# Altium PCB WX0.000.863.PcbDoc (part 1 of 4)
Units mil, origin at the board's own origin, x right, y up, seen from the top; angles counter-clockwise.
Board outline 6000 x 4000 mil, 2 copper layers (Top Layer, Bottom Layer); 210 components, 152 nets, 629 pads, 401 vias.
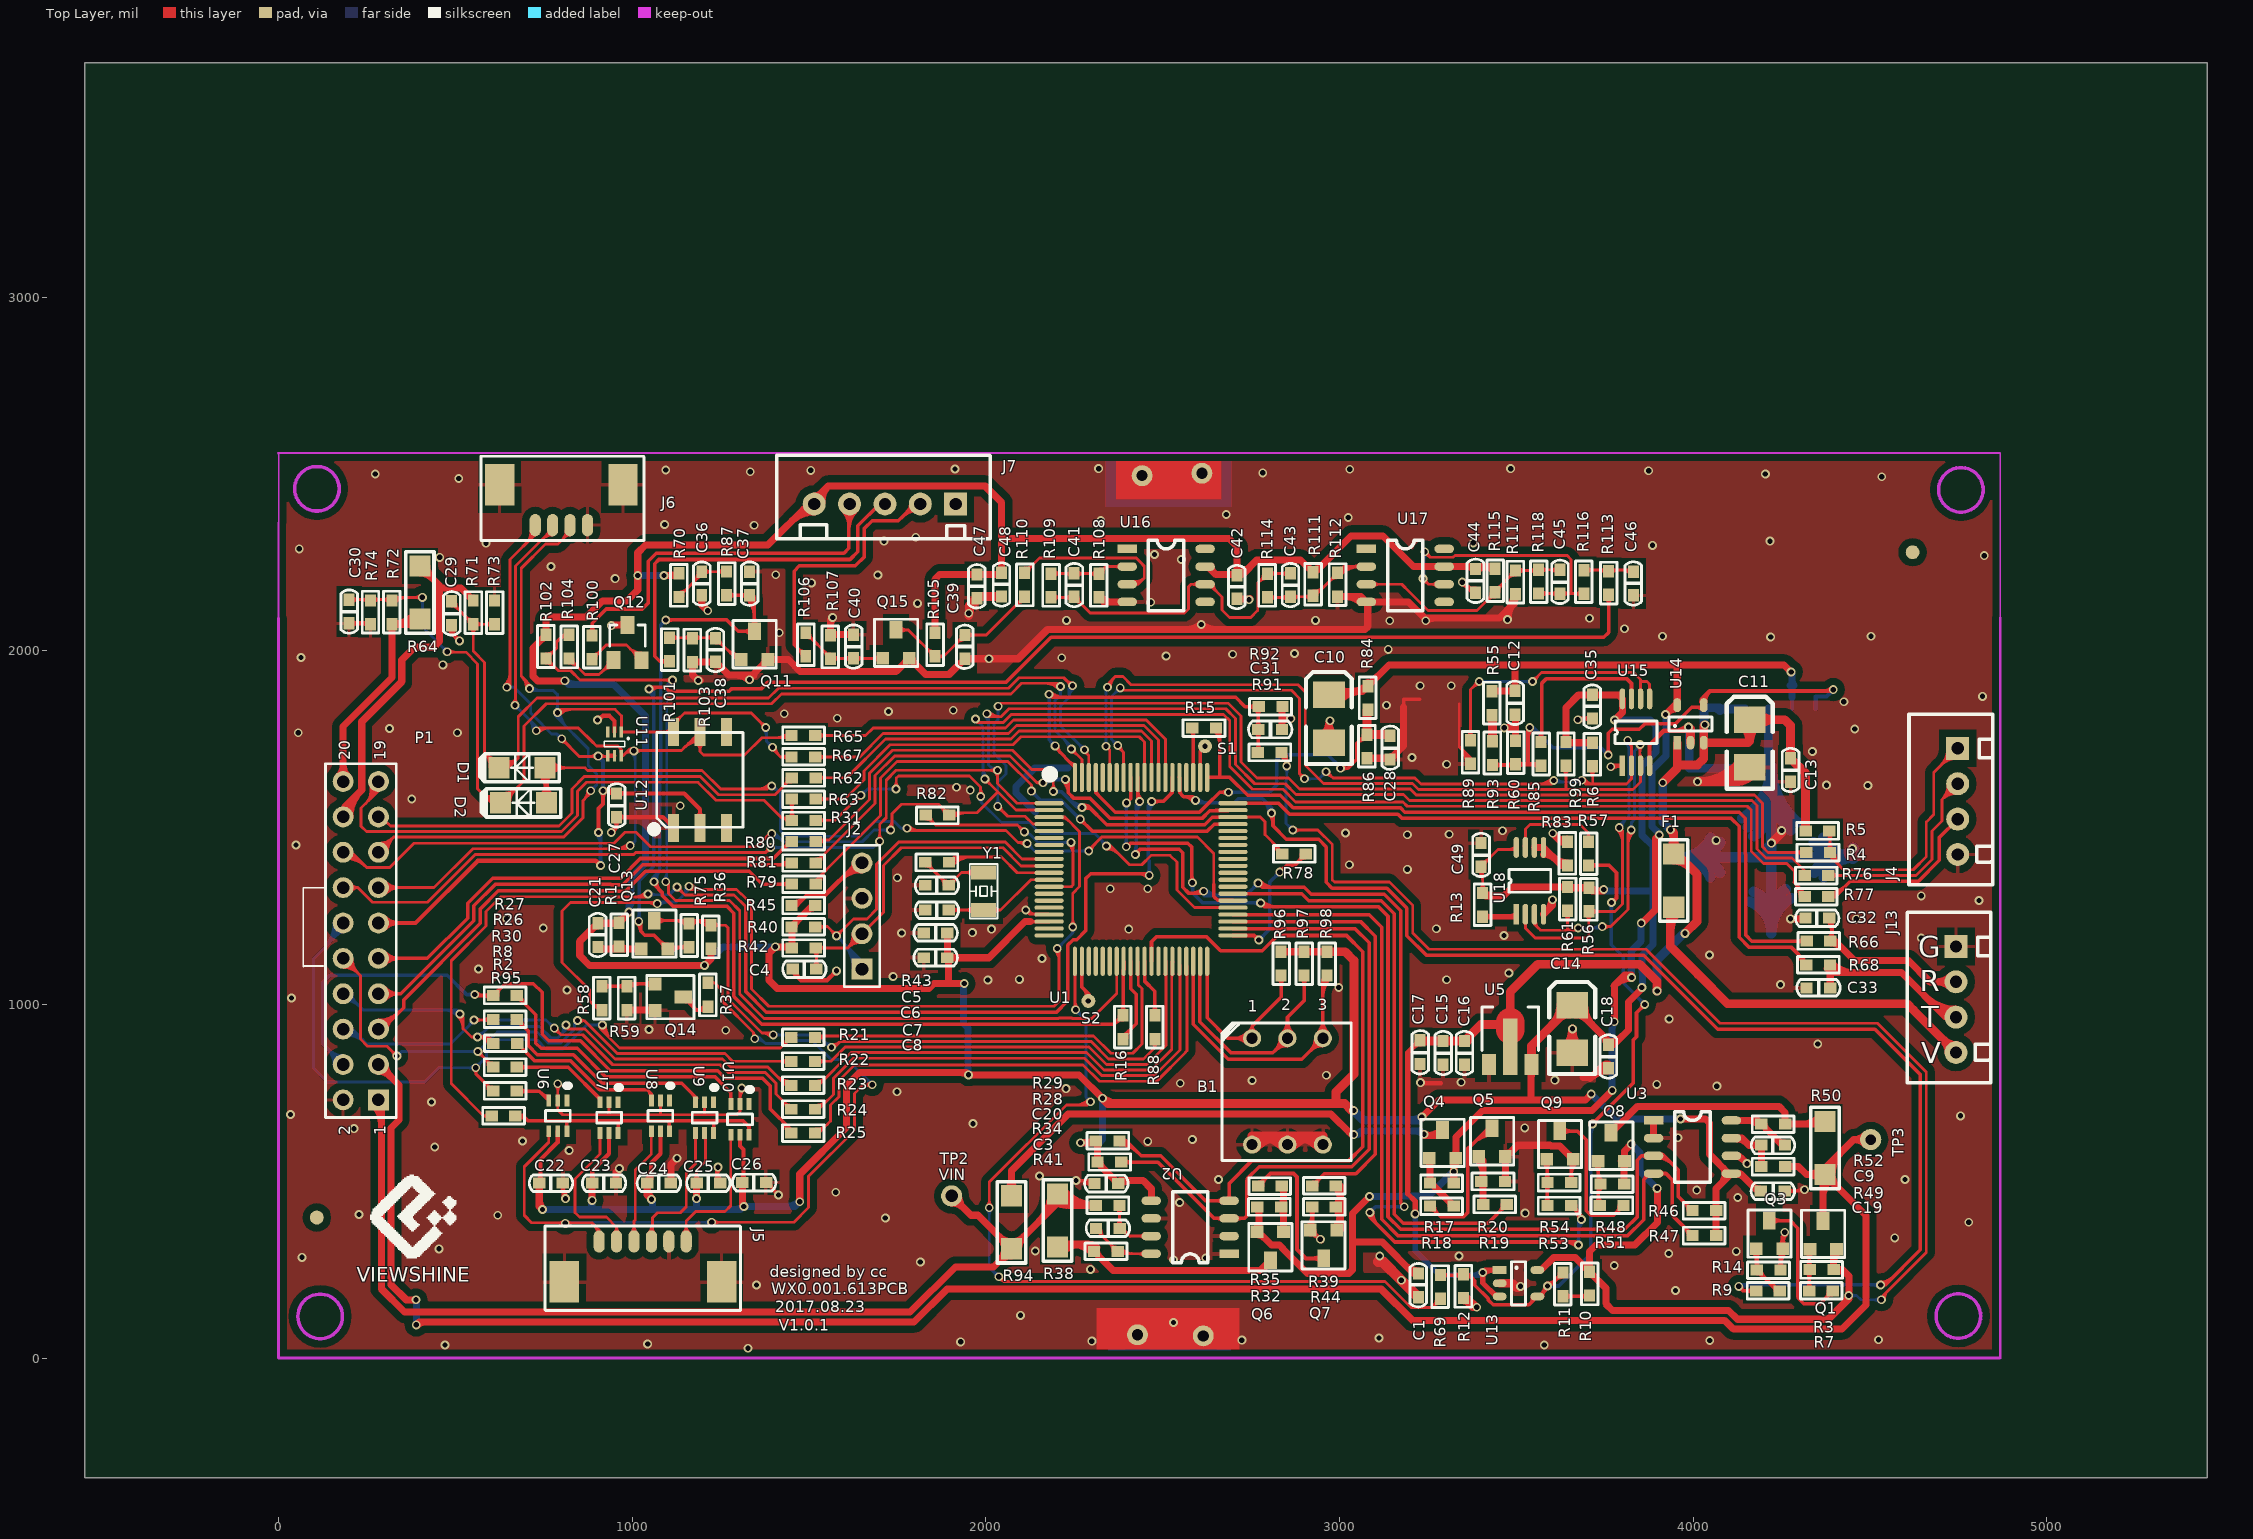
[diagram p0: Top Layer view]
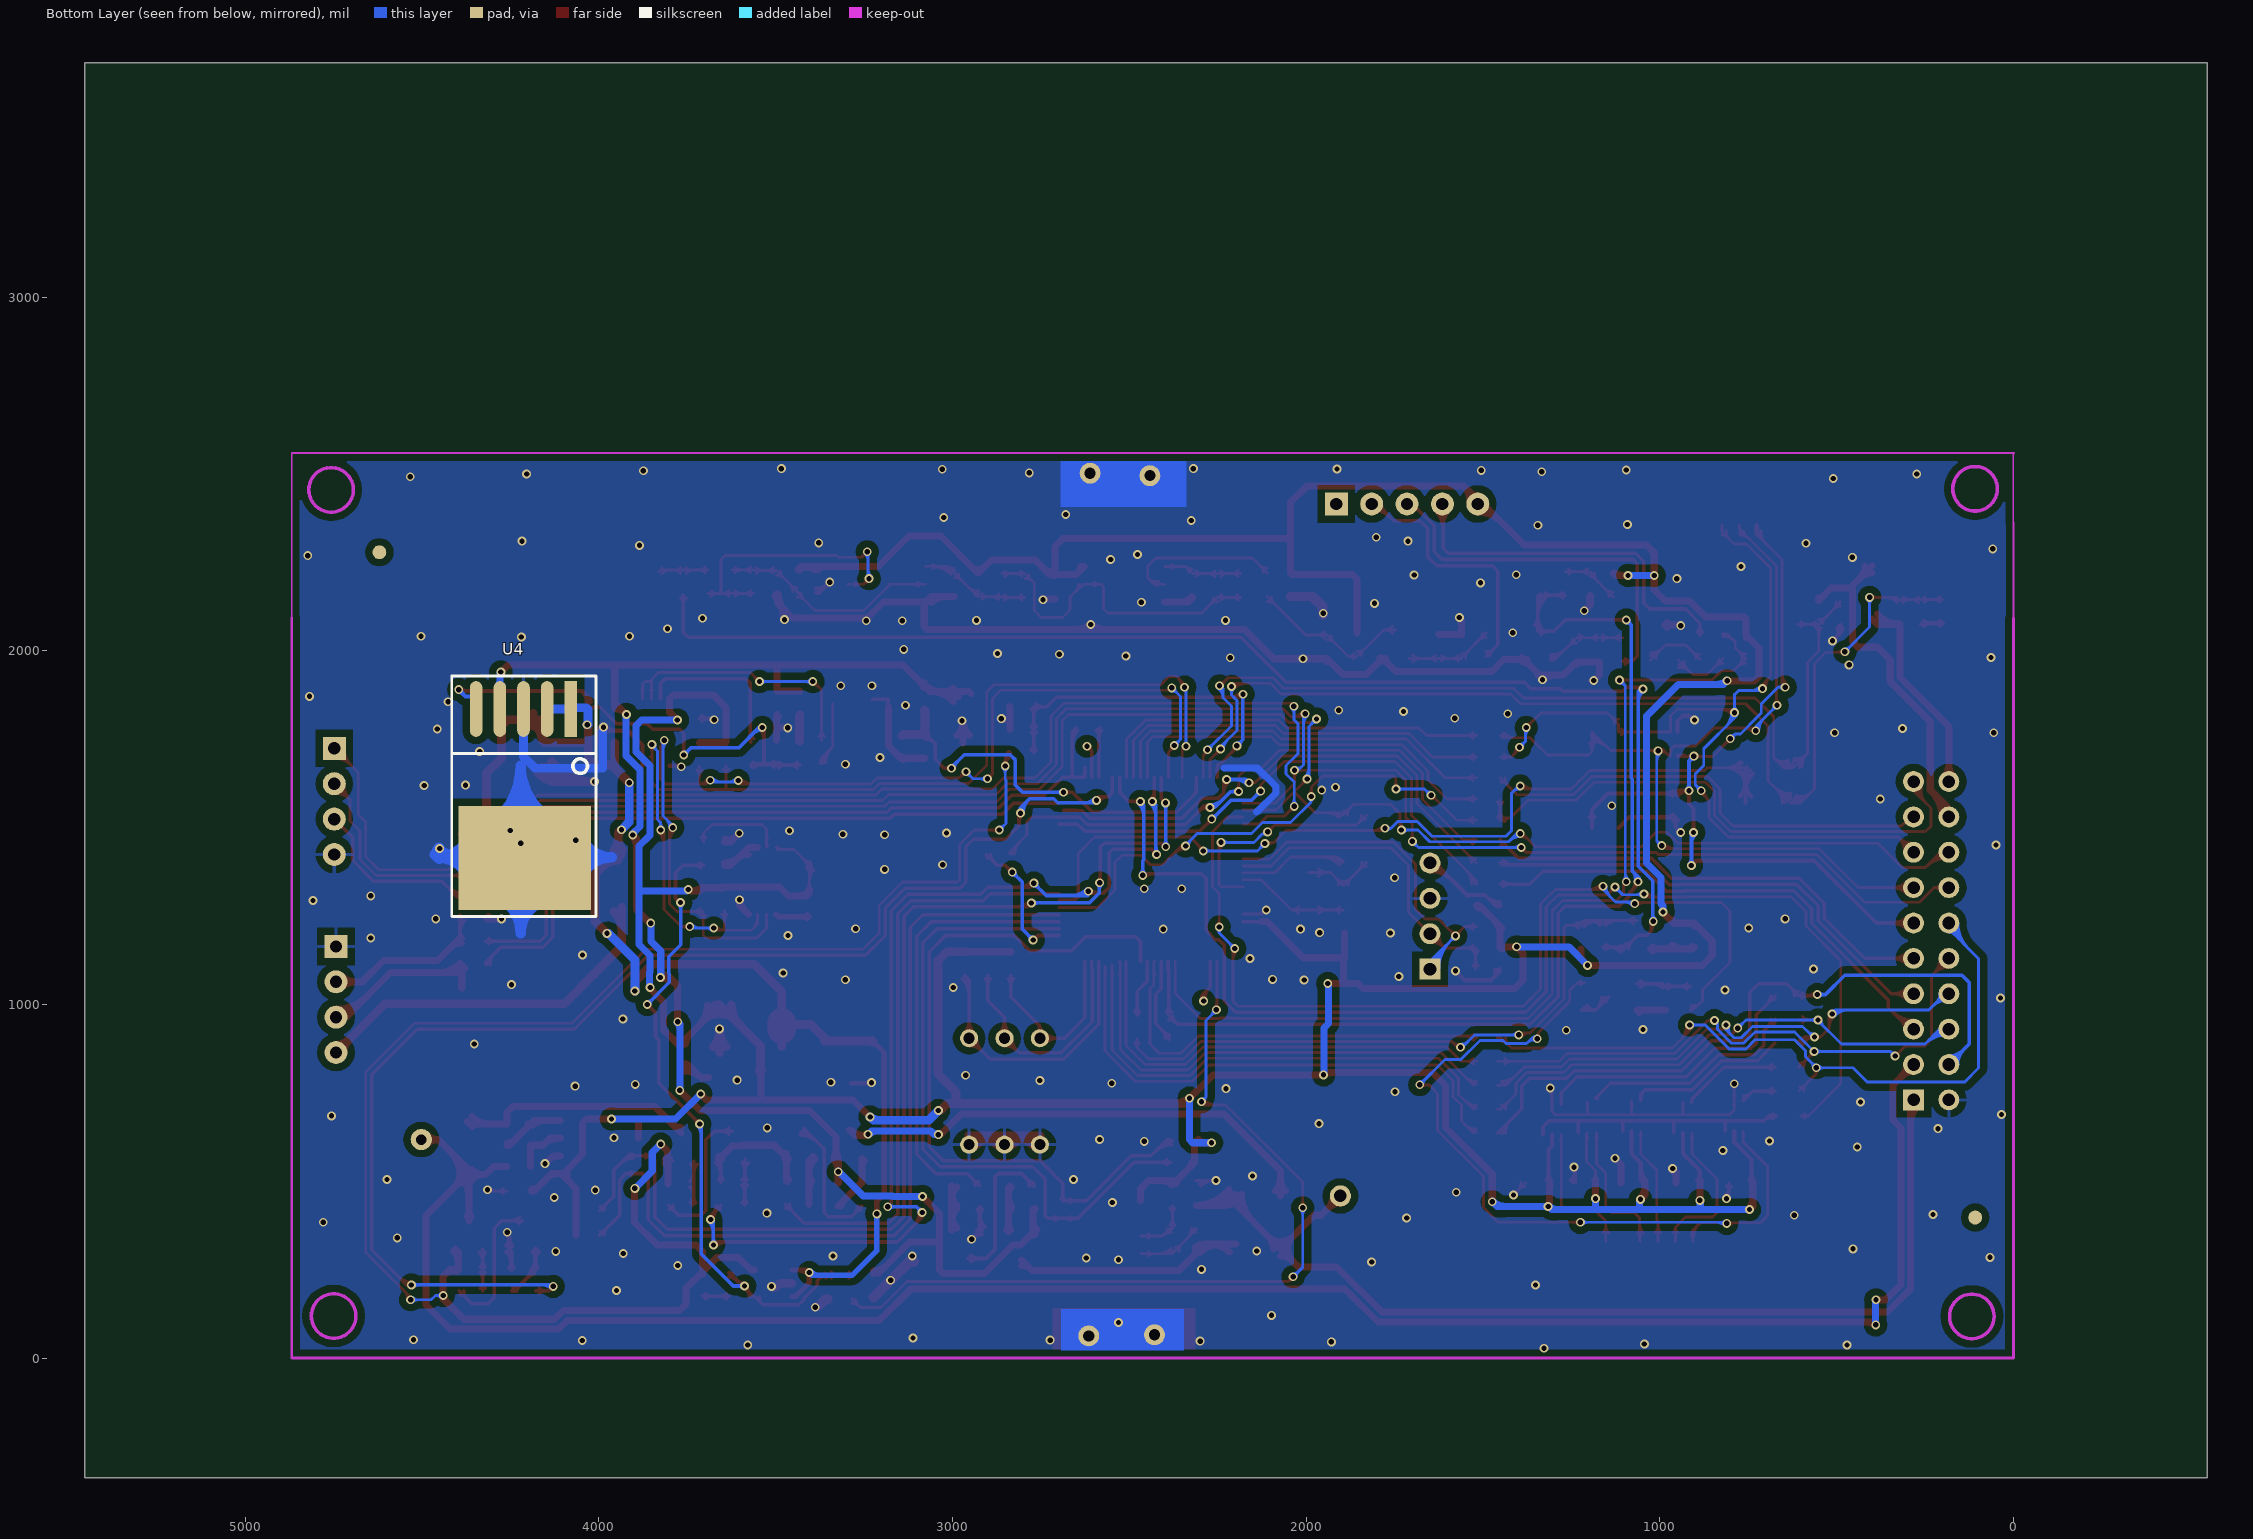
[diagram p1: Bottom Layer view, seen from below]

## Layer stack, top to bottom
Top Solder: solder mask 0.4, Solder Resist, Dk 3.5
Top Layer: signal copper 1.4
Dielectric1: dielectric 12.6, FR-4, Dk 4.8
Bottom Layer: signal copper 1.4
Bottom Solder: solder mask 0.4, Solder Resist, Dk 3.5

## Board outline
-547.02,-338 5452.98,-338 5452.98,3662 -547.02,3662

## Design rules (kind name [scope] priority, off if disabled: settings)
Clearance Clearance_1 [inpolygon] p1: gap=20 ignorepadtopadclearanceinfootprint=FALSE except(0: Arc-Hole Track-Hole SMDPad-Hole THPad-Hole Via-Hole Fill-Hole Poly-Hole Region-Hole Text-Hole)
Clearance [All] p2: gap=7.8 ignorepadtopadclearanceinfootprint=FALSE except(0: Arc-Hole Track-Hole SMDPad-Hole THPad-Hole Via-Hole Fill-Hole Poly-Hole Region-Hole Text-Hole)
ComponentClearance [All] p1 off: gap=10 collisioncheckmode=3 verticalgap=10 showdistances=FALSE
MinimumSolderMaskSliver [All] p1 off: minsoldermaskwidth=8
PlaneConnect [All] p1: planeconnectstyle=Relief reliefexpansion=20 reliefentries=4 reliefconductorwidth=15 reliefairgap=10
PolygonConnect PolygonConnect_1 [Isvia] p1: connectstyle=Direct reliefconductorwidth=10 reliefentries=4 polygonreliefangle="90 Angle" airgapwidth=10
PolygonConnect [All] p2: connectstyle=Relief reliefconductorwidth=10 reliefentries=4 polygonreliefangle="90 Angle" airgapwidth=10
RoutingVias [All] p1: holewidth=15 width=25 viastyle="Through Hole" minholewidth=15 minwidth=25 maxholewidth=28 maxwidth=50
SilkToSilkClearance [All] p1 off: silktosilkclearance=10
SilkToSolderMaskClearance SilkscreenOverComponentPads [IsPad] p1 off: minsilkscreentomaskgap=10 clearancetoexposedcopper=TRUE
SolderMaskExpansion [All] p1: expansion=4
Width [All] p1: maxlimit=300 minlimit=8 preferedwidth=8
25 further rules are at their usual default settings.

## Classes and differential pairs
component class 1608卡-原理图2: C22 C23 C24 C25 C26 C27 C29 C30 D1 D2 J4 J5 J6 J11 MOT1 P1 P2 Q14 R2 R4 R5 R8 R21 R22 R23 R24 R25 R26 R27 R30 R31 R37 R58 R59 R62 R63 R64 R65 R67 R71 R72 R73 R74 R76 R77 R79 R80 R81 R95 U6 U7 U8 U9 U10 U11 U12
component class 1608卡-原理图1: *1 B1 C1 C3 C4 C5 C6 C7 C8 C9 C10 C11 C12 C13 C14 C15 C16 C17 C18 C19 C20 C21 C28 C31 C32 C33 C35 C49 F1 J2 J13 Q1 Q3 Q4 Q5 Q6 Q7 Q8 Q9 Q13 R1 R3 R6 R7 R9 R10 R11 R12 R13 R14 R15 R16 R17 R18 R19 R20 R28 R29 R32 R34 R35 R36 R38 R39 R40 R41 R42 R43 R44 R45 R46 R47 R48 R49 R50 R51 R52 R53 R54 R55 R56 R57 R60 R61 R66 R68 R69 R75 R78 R82 R83 R84 R85 R86 R88 R89 R91 R92 R93 R94 R96 R97 R98 R99 S1 S2 TP2 TP3 U1 U2 U3 U4 U5 U13 U14 U15 U18 Y1
component class 1608卡-原理图3: C36 C37 C38 C39 C40 C41 C42 C43 C44 C45 C46 C47 C48 D3 D4 D5 J7 Q11 Q12 Q15 R70 R87 R100 R101 R102 R103 R104 R105 R106 R107 R108 R109 R110 R111 R112 R113 R114 R115 R116 R117 R118 U16 U17

## Components (designator, comment, footprint, x,y, rotation, side; value= is the part's Value field where it differs from the comment)
B1 "BOMA-3" BOMA-3 2853,754 r0 top
C1 "0.1u" C0603 3223,239 r270 top
C3 "0.1u" C0603 2377.98,367 r180 top
C4 "0.1u" C0603 1454.41,1100 r0 top
C5 "10Pf" c0603 1828.98,1337 r0 top
C6 "10Pf" c0603 1828.98,1267 r0 top
C7 "0.1u" C0603 1890.98,1202 r180 top
C8 "10uF" C0603 1890.98,1132 r180 top
C9 "0.1u" C0603 4192.98,602 r0 top
C10 "100uF" 3528 2970,1875 r90 top
C11 "100uF" 3528 4160,1805 r90 top
C12 "0.1u" C0603 3495.98,1820 r90 top
C13 "0.1u" C0603 4275,1630 r90 top
C14 "100uF" 3528 3657.98,998.36 r90 top
C15 "0.1u" C0603 3292.98,830 r90 top
C16 "100p" C0603 3352.98,830 r90 top
C17 "0.1u" C0603 3227.98,832 r90 top
C18 "0.1u" C0603 3760,820 r90 top
C19 "0.1u" C0603 4257.98,472 r180 top
C20 "0.1u" C0603 2308,494 r0 top
C21 "1nf" C0603 903,1229 r270 top
C22 "0.1u" C0603 738,495 r0 top
C23 "0.1u" C0603 888,495 r0 top
C24 "0.1u" C0603 1043,495 r0 top
C25 "0.1u" C0603 1183,495 r0 top
C26 "0.1u" C0603 1312.49,497 r0 top
C27 "0.1u" C0603 955.98,1530 r90 top
C28 "1nF" C0603 3142.98,1693 r90 top
C29 "1nF" C0603 490,2073 r90 top
C30 "1nF" C0603 199.98,2078 r90 top
C31 "1nF" C0603 2837,1777 r180 top
C32 "100p" C0603 4318,1244 r0 top
C33 "100p" C0603 4387,1047 r180 top
C35 "0.1uF" c0603 3715,1875 r270 top
C36 "0.1u" C0603 1197,2157 r90 top
C37 "100pf" C0603 1332,2157 r90 top
C38 "10pf" C0603 1236,2035 r270 top
C39 "100p" C0603 1941,2044 r270 top
C40 "10p" C0603 1626,1979 r90 top
C41 "100p" C0603 2250,2153 r90 top
C42 "0.1u" C0603 2710,2213 r270 top
C43 "100p" C0603 2861,2153 r90 top
C44 "0.1u" C0603 3385,2230.49 r270 top
C45 "10p" C0603 3623,2162 r90 top
C46 "0.1u" C0603 3831,2223 r270 top
C47 "0.1u" C0603 1975,2215 r270 top
C48 "10uF" C0603 2045,2220 r270 top
C49 "0.1uF" c0603 3400,1390 r90 top
D1 "DSK14" LL34 689,1669 r180 top
D2 "DSK14" LL34 693,1570 r180 top
F1 "1A" R1206 3945,1350 r90 top
J2 "Header 4" HDR1X4 1650,1100 r90 top
J4 "Header 4" HDX4 4748,1574 r0 top
J5 "CARD1608" SMT-1.25-6 1030,330 r0 top
J6 "Header 4" SMT-1.25-4 800,2355 r180 top
J7 "TEM" JP5 1615,2415 r270 top
J13 "Header 4" HDX4 4743,1014 r0 top
P1 "Header 10X2" HDR2X10 283,730.26 r90 top
Q1 "RZR040P01TL" SOT-23-MOS 4366.98,343 r0 top
Q3 "9013" SOT-23-TRAN 4214.98,344 r0 top
Q4 "RZR040P01TL" SOT-23-MOS 3290.98,600 r0 top
Q5 "9013" SOT-23-TRAN 3430.98,605 r0 top
Q6 "RZR040P01TL" SOT-23-MOS 2804.98,322 r180 top
Q7 "9013" SOT-23-TRAN 2955.56,327 r180 top
Q8 "RZR040P01TL" SOT-23-MOS 3767.98,592 r0 top
Q9 "9013" SOT-23-TRAN 3622.98,597 r0 top
Q11 "9013" SOT-23-TRAN 1346,2010 r0 top
Q12 "9012" SOT23-9013 1027,1973 r0 top
Q13 "9013" SOT-23-TRAN 1062.98,1192 r0 top
Q14 "9013" SOT-23-TRAN 1100,1020.98 r270 top
Q15 "9013" SOT-23-TRAN 1746,2014 r0 top
R1 "4.7k" R0603 963,1164 r90 top
R2 "10" R0603 674,755 r180 top
R3 "100k" R0603 4330,250 r0 top
R4 "22" R0603 4320,1430 r0 top
R5 "22" R0603 4385,1490 r180 top
R6 "10K" R0603 3715,1740 r270 top
R7 "10k" R0603 4395,190 r180 top
R8 "10" R0603 674,822.5 r180 top
R9 "10k" R0603 4245,190 r180 top
R10 "20k" R0603 3707,177 r90 top
R11 "0" R0603 3632,242 r270 top
R12 "10k" R0603 3350,170 r90 top
R13 "10k" R0603 3405,1315 r270 top
R14 "10k" R0603 4179.98,249 r0 top
R15 "100" r0603 2583.98,1782 r0 top
R16 "100" R0603 2388,969 r270 top
R17 "100k" R0603 3255.98,495 r0 top
R18 "10k" R0603 3255.98,430 r0 top
R19 "10k" R0603 3405.98,435 r0 top
R20 "10k" R0603 3400.98,500 r0 top
R21 "10K" R0603 1517,906.98 r180 top
R22 "10k" R0603 1517,839.23 r180 top
R23 "10k" R0603 1517,771.48 r180 top
R24 "10k" R0603 1517,703.73 r180 top
R25 "10k" R0603 1517,635.98 r180 top
R26 "10" R0603 674,957.5 r180 top
R27 "10" R0603 674,1025 r180 top
R28 "10k" R0603 2383,554 r180 top
R29 "10K" R0603 2378,614 r180 top
R30 "10" R0603 675,890 r180 top
R31 "100" R0603 1451.78,1520.64 r0 top
R32 "100k" R0603 2834.98,427 r180 top
R34 "10" R0603 2377.98,432 r180 top
R35 "10k" R0603 2769.98,487 r0 top
R36 "4.7k" R0603 1223,1224 r270 top
R37 "10k" R0603 1214,994 r90 top
R38 "100" R1206 2203,389 r270 top
R39 "10k" R0603 2989.98,487 r180 top
R40 "1K" R0603 1517.78,1219.18 r180 top
R41 "10" R0603 2372.98,302 r180 top
R42 "20k" R0603 1451.78,1160.09 r0 top
R43 "100K" r0603 1828.98,1402 r0 top
R44 "10k" R0603 2989.98,427 r180 top
R45 "10" R0603 1517.78,1279.27 r180 top
R46 "10k" R0603 3997.98,417 r0 top
R47 "10K" R0603 3997.98,347 r0 top
R48 "100k" R0603 3737.98,492 r0 top
R49 "10" R0603 4192.98,542 r0 top
R50 "100" R1206 4373,594 r90 top
R51 "10k" R0603 3802.98,432 r180 top
R52 "10" R0603 4192.98,662 r0 top
R53 "10k" R0603 3587.98,432 r0 top
R54 "10k" R0603 3587.98,497 r0 top
R55 "22K" R0603 3430.98,1885 r270 top
R56 "10k" R0603 3705,1330 r270 top
R57 "3K 1%" R0603 3704,1393 r90 top
R58 "10k" R0603 915,1050.98 r270 top
R59 "10k" R0603 985,1050.98 r270 top
R60 "10K" R0603 3498,1679 r90 top
R61 "10k" R0603 3645,1265 r90 top
R62 "100" R0603 1451.78,1640.82 r0 top
R63 "100" R0603 1451.78,1580.73 r0 top
R64 "20" R1206 400,2165 r90 top
R65 "100" R0603 1517.78,1760 r180 top
R66 "22" R0603 4388,1179 r180 top
R67 "100" R0603 1517.78,1699.91 r180 top
R68 "22" R0603 4387,1112 r180 top
R69 "20k" R0603 3285,235 r270 top
R70 "10" R0603 1132,2152 r90 top
R71 "100" R0603 550.98,2075 r90 top
R72 "100" R0603 320.98,2142 r270 top
R73 "20k" R0603 610.98,2075 r90 top
R74 "20k" R0603 260.98,2142 r270 top
R75 "4.7k" R0603 1160.98,1162 r90 top
R76 "22" R0603 4315,1365 r0 top
R77 "22" R0603 4315,1305 r0 top
R78 "100" R0603 2905,1425 r180 top
R79 "100" R0603 1451.78,1340.36 r0 top
R80 "100" R0603 1451.78,1460.55 r0 top
R81 "100" R0603 1451.78,1400.45 r0 top
R82 "100" R0603 1830,1535 r0 top
R83 "5.1K 1%" R0603 3645,1460 r270 top
R84 "30k" R0603 3080,1900 r270 top
R85 "3K 1%" R0603 3570,1675 r90 top
R86 "20k" R0603 3077.98,1763 r270 top
R87 "20k" R0603 1267,2157 r90 top
R88 "100" R0603 2478,969 r270 top
R89 "5.1K 1%" R0603 3370,1680 r90 top
R91 "1k" R0603 2836,1712 r180 top
R92 "20k" R0603 2772,1842 r0 top
R93 "3k" R0603 3433,1744 r270 top
R94 "1" R1206 2073,384 r90 top
R95 "0" R0603 670,685 r180 top
R96 "20k" R0603 2835,1082 r90 top
R97 "20k" R0603 2900,1082 r90 top
R98 "20k" R0603 2965,1082 r90 top
R99 "10K" R0603 3640,1675 r90 top
R100 "47" R0603 887,2043 r270 top
R101 "20k" R0603 1106,1970 r90 top
R102 "20k" R0603 757,2045 r270 top
R103 "47k" R0603 1171,2035 r270 top
R104 "3k" R0603 822,1978 r90 top
R105 "10K" R0603 1856,1984 r90 top
R106 "1K" R0603 1491,1984 r90 top
R107 "1K" R0603 1561,2044 r270 top
R108 "10k" R0603 2320,2218 r270 top
R109 "10k" R0603 2185,2218 r270 top
R110 "10K" R0603 2110,2153 r90 top
R111 "22k" R0603 2925,2155 r90 top
R112 "20k" R0603 2995,2220 r270 top
R113 "10" R0603 3761,2158 r90 top
R114 "20k" R0603 2796,2218 r270 top
R115 "20k" R0603 3440,2165 r90 top
R116 "47" R0603 3691,2228 r270 top
R117 "20k" R0603 3498,2227 r270 top
R118 "1M" R0603 3563,2162 r90 top
S1 "Test Point  PASS" TP_S 2620,1730 r0 top
S2 "Test Point  PASS" TP_S 2290,1010 r0 top
TP2 "TP" TEST_PAD#1 1903.43,458.54 r90 top
TP3 "TP" TEST_PAD#2 4523,594 r90 top
U1 "R7F0C003/4M2DFB" MSP437QFP80 2438.98,1382 r90 top locked
U2 "ina219" SO-8 2577.98,370 r180 top
U3 "ina219" SO-8 3997.98,597 r0 top
U4 "SPX29302T5" TO-263-5 4213,1784 r0 bottom locked
U5 "S-1206B33" SOT-89 3482.98,865 r0 top
U6 "TS5A3159" SOT-23(6) 790,685 r270 top
U7 "TS5A3159" SOT-23(6) 935,680 r270 top
U8 "TS5A3159" SOT-23(6) 1080,685 r270 top
U9 "TS5A3159" SOT-23(6) 1205,680 r270 top
U10 "TS5A3159" SOT-23(6) 1305,675 r270 top
U11 "tem102" SOP6 969.98,1768 r270 top
U12 "HP206C" HP206C-TEST 1192,1635 r90 top
U13 "SPX3819-ADJ" SOT23-5 3453,249 r0 top
U14 "SPX3819-ADJ" SOT23-5 3955,1740 r90 top
U15 "MCP4561" MSOP 3800,1675 r90 top
U16 "MCP6141-8" SO-8 2510,2213 r0 top
U17 "MCP6141-8" SO-8 3186,2213 r0 top
U18 "MCP4561" MSOP 3500,1255 r90 top
Y1 "32768" XTAL-2S 1993.98,1267 r90 top

## Footprints (in the part's own frame and the unit in brackets; to place one, negate y for a bottom-side part, rotate by r counter-clockwise, add the part's x,y. Pads: shape width x height; smd on the part's side, far side on the other; paste and mask are expansions set on the pad)
3528 [mil]
  rect 75x90 smd: 1(0,0) 2(-135,0)
  silkscreen extent -195,-65 65,65
BOMA-3 [mm]
  round 1.3 hole 0.8: 1(-2.54,3.82) 2(0,3.82) 3(2.54,3.82) 4(-2.54,-3.82) 5(0,-3.82) 6(2.54,-3.82)
  silkscreen extent -4.7,-4.95 4.57,4.92
C0603 [mil]
  rect 35x31 smd: 1(-0.49,0) 2(66.51,0)
  silkscreen extent -29,-24 94,23, body extent 1,-15 72,15, height 20
c0603 [mil]
  rect 35x31 smd: 1(-0.49,0) 2(66.51,0)
  silkscreen extent -29,-24 94,23, body extent 1,-15 72,15, height 20
HDR1X4 [mm] "Connector; Header; 4 Position"
  rect 1.5x1.5 hole 0.9: 1(0,0)
  round 1.5 hole 0.9: 2(2.54,0) 3(5.08,0) 4(7.62,0)
  silkscreen extent -1.27,-1.27 8.89,1.27
HDR2X10 [mm] "Connector; Header; 10x2 Position"
  rect 1.5x1.5 hole 0.9: 1(0,0)
  round 1.5 hole 0.9: 2(0,2.54) 3(2.54,0) 4(2.54,2.54) 5(5.08,0) 6(5.08,2.54) 7(7.62,0) 8(7.62,2.54) 9(10.16,0) 10(10.16,2.54) 11(12.7,0) 12(12.7,2.54) 13(15.24,0) 14(15.24,2.54) 15(17.78,0) 16(17.78,2.54) 17(20.32,0) 18(20.32,2.54) 19(22.86,0) 20(22.86,2.54)
  silkscreen extent -1.27,-1.27 24.13,3.81
HDX4 [mil]
  rect 65x65 hole 35: 1(0,150)
  round 65 hole 35: 2(0,50) 3(0,-50) 4(0,-150)
  silkscreen extent -138,-236 98,247
HP206C-TEST [mm]
  rect 2x0.8 smd: 1(-3.448,1.9) 2(-3.448,0) 3(-3.448,-1.9) 4(3.448,-1.9) 5(3.448,0) 6(3.448,1.9)
  silkscreen extent -3.56,-3.1 3.4,3.3
JP5 [mil] "2.54"
  rect 65x65 hole 35: 1(0,300)
  round 65 hole 35: 2(0,200) 3(0,100) 4(0,0) 5(0,-100)
  silkscreen extent -138,-206 98,397
LL34 [mil] "1N4148"
  rect 60x60 smd: 1(-65,0) 2(65,0)
  silkscreen extent -105,-40 120,40, body extent -64,-29 74,30, height 61
MSOP [mm]
  rect 1.5x0.39 smd: 1(0,0)
  oval 1.5x0.39 smd: 2(0,-0.65) 3(0,-1.3) 4(0,-1.95) 5(4.8,-1.95) 6(4.8,-1.3) 7(4.8,-0.65) 8(4.8,0)
  silkscreen extent 1.58,-2.48 3.21,0.52
MSP437QFP80 [mm]
  oval 0.3x2.1 smd: 1(4.75,6.6) 2(4.25,6.6) 3(3.75,6.6) 4(3.25,6.6) 5(2.75,6.6) 6(2.25,6.6) 7(1.75,6.6) 8(1.25,6.6) 9(0.75,6.6) 10(0.25,6.6) 11(-0.25,6.6) 12(-0.75,6.6) 13(-1.25,6.6) 14(-1.75,6.6) 15(-2.25,6.6) 16(-2.75,6.6) 17(-3.25,6.6) 18(-3.75,6.6) 19(-4.25,6.6) 20(-4.75,6.6) 41(-4.75,-6.6) 42(-4.25,-6.6) 43(-3.75,-6.6) 44(-3.25,-6.6) 45(-2.75,-6.6) 46(-2.25,-6.6) 47(-1.75,-6.6) 48(-1.25,-6.6) 49(-0.75,-6.6) 50(-0.25,-6.6) 51(0.25,-6.6) 52(0.75,-6.6) 53(1.25,-6.6) 54(1.75,-6.6) 55(2.25,-6.6) 56(2.75,-6.6) 57(3.25,-6.6) 58(3.75,-6.6) 59(4.25,-6.6) 60(4.75,-6.6)
  oval 2.1x0.3 smd: 21(-6.6,4.75) 22(-6.6,4.25) 23(-6.6,3.75) 24(-6.6,3.25) 25(-6.6,2.75) 26(-6.6,2.25) 27(-6.6,1.75) 28(-6.6,1.25) 29(-6.6,0.75) 30(-6.6,0.25) 31(-6.6,-0.25) 32(-6.6,-0.75) 33(-6.6,-1.25) 34(-6.6,-1.75) 35(-6.6,-2.25) 36(-6.6,-2.75) 37(-6.6,-3.25) 38(-6.6,-3.75) 39(-6.6,-4.25) 40(-6.6,-4.75) 61(6.6,-4.75) 62(6.6,-4.25) 63(6.6,-3.75) 64(6.6,-3.25) 65(6.6,-2.75) 66(6.6,-2.25) 67(6.6,-1.75) 68(6.6,-1.25) 69(6.6,-0.75) 70(6.6,-0.25) 71(6.6,0.25) 72(6.6,0.75) 73(6.6,1.25) 74(6.6,1.75) 75(6.6,2.25) 76(6.6,2.75) 77(6.6,3.25) 78(6.6,3.75) 79(6.6,4.25) 80(6.6,4.75)
  silkscreen extent 6.52,6.25 7.12,6.85
R0603 [mil]
  rect 35x31 smd: 1(0,0) 2(67,0)
  silkscreen extent -26,-24 92,23, body extent 0,-15 71,15, height 12
r0603 [mil]
  rect 35x31 smd: 1(0,0) 2(67,0)
  silkscreen extent -26,-24 92,23, body extent 0,-15 71,15, height 12
R1206 [mil]
  rect 60x60 smd: 1(-75,0) 2(75,0)
  silkscreen extent -115,-40 115,40, body extent -87,-29 91,29, height 20
SMT-1.25-4 [mm]
  oval 0.8x1.6 smd: 1(-1.875,0) 2(-0.625,0) 3(0.625,0) 4(1.875,0)
  rect 2.1x3 smd: 5(-4.425,-2.9) 6(4.425,-2.9)
  silkscreen extent -5.92,-4.95 5.77,1.1
SMT-1.25-6 [mm]
  oval 0.8x1.6 smd: 1(-3.125,0) 2(-1.875,0) 3(-0.625,0) 4(0.625,0) 5(1.875,0) 6(3.125,0)
  rect 2.1x3 smd: 7(-5.625,-2.9) 8(5.675,-2.9)
  silkscreen extent -7.02,-4.95 7.02,1.1
SO-8 [mil]
  rect 55.12x24.02 smd: 1(-110,75)
  oval 55.12x24 smd: 2(-110,25) 3(-110,-25) 4(-110,-75) 5(110,-75) 6(110,-25) 7(110,25) 8(110,75)
  silkscreen extent -50,-100 50,100
SOP6 [mm]
  rect 0.8x0.25 smd: 1(-0.05,0) 2(-0.05,-0.5) 3(-0.05,-1) 4(1.65,-1) 5(1.65,-0.5) 6(1.65,0)
  silkscreen extent 0.41,-1.25 0.98,0.48
SOT23-5 [mm]
  rect 1x0.55 smd: 1(0,0)
  oval 1x0.55 smd: 2(0,-0.95) 3(0,-1.9) 4(2.7,-1.9) 5(2.7,0)
  silkscreen extent 0.85,-2.5 1.85,0.6
SOT23-9013 [mil]
  rect 40x50 smd: 1(0,0) 2(-79.36,0.8) 3(-40,100)
  silkscreen extent -90,40 10,100
SOT-23(6) [mm]
  rect 0.85x0.35 smd: 1(-1.1,0.65) 2(-1.1,0) 3(-1.1,-0.65) 4(1.1,-0.65) 5(1.1,0) 6(1.1,0.65)
  silkscreen extent -2.16,-0.89 0.38,0.89
SOT-23-MOS [mil]
  rect 36x50 smd: D(0,45)
  rect 36x36 smd: G(-37,-35) S(38,-35)
  silkscreen extent -60,-59 62,75, body extent -44,-35 44,45, height 39
SOT-23-TRAN [mil]
  rect 36x36 smd: B(-37,-35) E(38,-35)
  rect 36x50 smd: C(0,45)
  silkscreen extent -60,-59 62,75, body extent -44,-35 44,45, height 39
SOT-89 [mil]
  rect 40x60 smd: 1(-60,-35) 3(60,-35)
  rect 40x160.63 smd: 2(0,15.32)
  Top Layer lines w80: 0,62.98 0,84.62
  silkscreen extent -80,5 80,128
TEST_PAD#1 [mil]
  round 60 hole 35.43: 1(0,0)
TEST_PAD#2 [mil]
  round 60 hole 30: 1(24.02,21.14)
TO-263-5 [mm]
  rect 9.5x7.5 smd: 0(-0.1,9.398)
  rect 0.9x4 smd: 1(-3.4,-1.3)
  oval 0.9x4 smd: 2(-1.7,-1.3) 3(0,-1.3) 4(1.7,-1.3) 5(3.4,-1.3)
  silkscreen extent -5.2,-3.67 5.15,13.6
TP_S [mm]
  round 1 smd: 1(0,0)
XTAL-2S [mm]
  rect 1x1.8 smd: 1(0,0) 2(2.7,0)
  silkscreen extent -0.6,-1 3.3,1

## Part data
C1 C7 C8 C12 C13 C15 C16 C17 C18 C19 C20 C21 C22 C23 C24 C25 C26 C27 C28 C29 C30 C31 C32 C33 C36 C47 C48: library part CAP, "无极性电容"
C3 C9: library part Pro28.tmp_UnNamed_45
C4 C37 C38 C39 C40 C41 C42 C43 C44 C45 C46: library part CAP, "Capacitor"
C5 C6: library part CAP1
C10 C11 C14: library part CAP-POL2, "钽电容"
C35 C49: library part Cap, "Capacitor"
D1 D2: library part DIODE, "Diode"
F1: library part FUSE
J2 J4 J6 J13: "Header, 4-Pin"
J5: library part CON6
J7: library part "Header 5", "Header, 5-Pin"
P1: "Header, 10-Pin, Dual row"
Q1 Q4 Q6 Q8: library part MOS-P, "P-channel  MOSFET"
Q3 Q5 Q7 Q9 Q11 Q13 Q14 Q15: library part NPN-S, "NPN Transistor"
R1 R36 R75 R88: library part "RES  PASS"
R2 R4 R5 R8 R26 R27 R30 R40 R42 R45 R70 R76 R77 R78 R79 R80 R81 R87 R101 R103 R105 R106 R107 R108 R109 R110 R111 R112 R113 R114 R115 R116 R117 R118: library part RES11
R3 R7 R9 R10 R11 R12 R13 R14 R15 R16 R17 R18 R19 R20 R21 R22 R23 R24 R25 R28 R29 R31 R32 R34 R35 R37 R38 R39 R41 R43 R44 R46 R47 R48 R49 R50 R51 R52 R53 R54 R58 R59 R62 R63 R65 R67 R69 R71 R72 R73 R74 R82 R84 R86 R91 R92 R93 R94 R95 R96 R97 R98: library part RES
R6 R56 R57 R61 R83 R85 R89 R99: library part Res2, "Resistor"
R55 R60 R64 R66 R68: library part RES2
R100 R102 R104: library part Pro28.tmp_UnNamed_37
S1 S2: "测试点"
U2 U3: library part Component_2
U5: library part VOLTRER1
Y1: library part XTAL1, "晶振,2PIN"

## Free pads (board coordinates)
  round 39.37 all layers, no hole mask+1: 0(108.58,397.49) 0(4620.58,2278.49)
  round 59.06 hole 31.5: 2(2429,66) 3(2615,63) 4(2442,2495) 5(2611,2502)

## Via types
v1: diameter 25, hole 15, Top Layer to Bottom Layer, tented both sides, 401 vias

## Nets (pads, with @x,y where several pads share a name; then routed paths per layer and width w, separated by ;. In a path a pad name is that pad's centre, name@x,y a point inside that pad or via, vN(x,y) a via of type N, cw(c..) or ccw(c..) an arc to the next point about the centre after c; other vN are vias at no path point)
AD0: B1.1 R96.1 U1.40 | length 680.8
  Top Layer w10: U1.40@2625.99,1122.16 2625.99,962.01 2683.61,904.39 B1.1@2753,904.39 2753,939 ; B1.1@2738.44,889.83 ccw(c2703.29,854.68) 2703.29,904.39 ccw(c2703.29,954.1) B1.1@2738.44,918.95 ; B1.1@2743.18,922.49 ccw(c2734.22,939) 2753,939 ; B1.1@2762.82,922.49 cw(c2771.78,939) 2753,939 ; R96.1@2827.58,1072.58 cw(c2809.65,1054.65) 2835,1054.65 cw(c2860.35,1054.65) R96.1@2842.42,1072.58 ; R96.1@2835,1082 2835,1021 2753,939
AD1: B1.2 R97.1 U1.39 | length 865.6
  Top Layer w10: U1.39@2605.33,1102 2605.33,950.85 2693.17,863 2811.61,863 B1.2@2853,904.39 2853,964 2900,1011 R97.1@2900,1082 ; U1.39@2606.31,1102 U1.39@2606.31,1122.16 ; B1.2@2832.41,904.39 cw(c2782.7,904.39) 2817.85,869.24 cw(c2853,834.09) B1.2@2853,883.8 ; B1.2@2838.44,918.95 ccw(c2803.29,954.1) 2853,954.1 ccw(c2902.71,954.1) B1.2@2867.56,918.95 ; R97.1@2892.58,1072.58 cw(c2874.65,1054.65) 2900,1054.65 cw(c2925.35,1054.65) R97.1@2907.42,1072.58
AD2: B1.3 R98.1 U1.38 | length 1033.7
  Top Layer w10: U1.38@2586.62,1122.16 2586.62,944.38 2685.8,845.2 2893.81,845.2 B1.3@2953,904.39 2953,1070 R98.1@2965,1082 ; B1.3@2932.41,904.39 cw(c2882.7,904.39) 2917.85,869.24 cw(c2953,834.09) B1.3@2953,883.8 ; B1.3@2938.44,918.95 ccw(c2903.29,954.1) 2953,954.1 ccw(c3002.71,954.1) B1.3@2967.56,918.95 ; 2953,1025.68 cw(c3019.32,1025.68) R98.1@2972.42,1072.58 ; 2953,1049.82 cw(c2995.18,1049.82) R98.1@2965.35,1079.65
AMPLIFY: C41.1 C43.2 R109.2 R114.1 U16.6 | length 1246
  Top Layer w8: R109.2@2185,2151 2248.49,2151 C41.1@2250,2152.51 2295.51,2107 2562,2107 2573,2118 2573,2181 2580,2188 U16.6@2620,2188 2632,2188 2668,2152 2668,2115 2689,2094 2749,2094 2768.7,2113.7 2768.7,2190.7 R114.1@2796,2218 2859.49,2218 C43.2@2861,2219.51 ; R109.2@2193.13,2142.87 cw(c2212.76,2123.24) 2212.76,2151 cw(c2212.76,2178.76) R109.2@2193.13,2159.13 ; 2221.05,2151 cw(c2221.05,2121.56) C41.1@2241.87,2142.38 ; 2223.42,2151 ccw(c2223.42,2177.09) C41.1@2241.87,2158.64 ; C41.1@2250,2139.01 cw(c2250,2106.42) 2273.05,2129.46 ; C41.1@2261.5,2150.51 ccw(c2284.43,2150.51) 2268.22,2134.29 ; U16.6@2598.78,2182.34 ccw(c2585.13,2168.69) 2585.13,2188 ccw(c2585.13,2207.31) U16.6@2598.78,2193.66 ; U16.6@2635.56,2180 cw(c2635.56,2169.28) 2643.14,2176.86 ; U16.6@2643.56,2188 ccw(c2671.46,2188) 2651.73,2168.27 ; 2772.95,2194.95 cw(c2796,2171.91) R114.1@2796,2204.5 ; 2777.78,2199.78 ccw(c2761.57,2216) R114.1@2784.5,2216 ; R114.1@2804.13,2209.87 cw(c2823.76,2190.24) 2823.76,2218 cw(c2823.76,2245.76) R114.1@2804.13,2226.13 ; 2832.05,2218 cw(c2832.05,2188.56) C43.2@2852.87,2209.38 ; 2834.42,2218 ccw(c2834.42,2244.09) C43.2@2852.87,2225.64
BAT_2_EN: R69.2 U1.21 | length 2706.4
  Top Layer w8: v1@2003.99,431.01 ccw(c1989.48,445.52) 2010,445.52 ccw(c2030.52,445.52) v1@2016.01,431.01 ; v1(2010,425) 2010,498 2228,716 2288,716 2297,725 v1(2296,725) ; v1(2037,230) 2050.2,216.8 ; v1@2037.59,221.52 cw(c2038.71,205.31) 2050.2,216.8 ; v1@2045.48,229.41 ccw(c2061.69,228.29) 2050.2,216.8 ; v1@2247.99,991.01 ccw(c2238.36,1000.64) 2251.98,1000.64 ; 2251.98,1010.41 ccw(c2279.41,1010.41) v1@2260.01,991.01 ; U1.21@2251.98,1122.16 2251.98,990.02 2254,988 v1(2254,985) ; 2253.75,716 ccw(c2253.75,767.25) v1@2289.99,731.01 ; 2273.07,716 ccw(c2273.07,747.93) v1@2295.65,725.35 ; 2836,216.8 2847,216.8 ; 3261.95,144.95 cw(c3285,121.91) R69.2@3285,154.5 ; 3266.78,149.78 ccw(c3250.57,166) R69.2@3273.5,166 ; R69.2@3285,168 3260.19,143.19 3202.61,143.19 3129,216.8 2847,216.8 ; 2050.2,216.8 2847,216.8
  Bottom Layer w8: v1@2003.99,418.99 cw(c1989.48,404.48) 2010,404.48 cw(c2030.52,404.48) v1@2016.01,418.99 ; v1(2010,425) 2010,257 v1(2037,230) ; v1@2028.5,230 ccw(c2007.98,230) 2022.49,244.51 ccw(c2037,259.02) v1@2037,238.5 ; v1@2254,976.5 cw(c2254,958.39) 2266.8,971.2 ; v1(2254,985) 2254,984 2283.1,954.9 2283.1,737.9 ; v1@2262.5,985 ccw(c2285.43,985) 2269.22,968.78 ; v1@2287.53,725.74 ccw(c2272.26,727.06) 2283.1,737.9 ; v1@2295.26,733.47 cw(c2293.94,748.74) 2283.1,737.9 ; v1(2296,725) 2283.1,737.9
CAP_CON1: R9.2 U1.65 | length 4109.2
  Top Layer w10: U1.65@2547.25,1641.84 2548.23,1640.86 2548.23,1598.66 2559.19,1587.7 ; U1.65@2548.16,1606.41 ccw(c2566.68,1606.41) 2553.58,1593.31 ; 2577.76,1587.7 cw(c2577.76,1566.95) v1@2595.09,1578.38 ; v1@2586.74,1572.87 ccw(c2559.19,1554.7) 2559.19,1587.7 ; v1(2593,1577) 2582.3,1587.7 2559.19,1587.7 ; v1@2802.7,1535.7 cw(c2780.24,1513.24) 2812,1513.24 ; v1(2808,1541) 2812,1545 2812,1505 2850,1467 2941,1467 2963,1445 2963,1345.02 2979,1329.02 3134.16,1329.02 3190.58,1272.59 3190.58,1194.42 3245.9,1139.1 3859.9,1139.1 4069,930 4514,930 4642,802 4642,306 4543,207 ; v1@4129,195.5 cw(c4129,177.39) 4141.8,190.2 cw(c4154.61,203) v1@4136.5,203 ; v1(4129,203) 4142,190 R9.2@4178,190 ; R9.2@4168.58,182.58 ccw(c4150.65,164.65) 4150.65,190 ccw(c4150.65,215.35) R9.2@4168.58,197.42 ; v1@4530,204.5 ccw(c4530,229.85) 4547.92,211.92 ; v1@4530,214.5 ccw(c4530,263.99) 4565,229
  Bottom Layer w10: v1@2591.23,1575.23 ccw(c2603.86,1587.86) 2603.86,1570 ; v1(2593,1577) 2600,1570 2702,1570 2714,1582 2782.2,1582 2808,1556.2 ; v1@2598.3,1582.3 ccw(c2628.01,1612.01) 2628.01,1570 ; 2784.45,1579.75 cw(c2745.7,1541) v1@2800.5,1541 ; 2801.52,1562.68 cw(c2779.84,1541) v1@2810.5,1541 ; v1@2803.44,1546.95 ccw(c2796.35,1556.2) 2808,1556.2 ; v1(2808,1541) 2808,1556.2 ; v1@2812.56,1546.95 cw(c2819.65,1556.2) 2808,1556.2 ; v1@4134.3,197.7 cw(c4156.76,175.24) 4156.76,207 ; v1@4137,207 v1(4530,207) ; v1@4524.7,201.7 ccw(c4511.89,188.89) 4511.89,207 ccw(c4511.89,225.11) v1@4524.7,212.3
CAP_CON2: U1.48
CARD1_ADD1: R4.1 U1.4 | length 3229.1
  Top Layer w8: v1@2033.98,1551.5 cw(c2033.98,1530.98) 2048.49,1545.49 cw(c2063.01,1560) v1@2042.48,1560 ; v1(2033.98,1560) 2061.98,1532 2111,1532 2133.05,1509.95 U1.4@2179.14,1509.95 ; v1(2035,1843) 2043.8,1851.8 2684.89,1851.8 2721.6,1815.09 2721.6,1685.09 2766.79,1639.9 2856.2,1639.9 2887,1609.1 3199.9,1609.1 3217,1592 4173,1592 4196,1569 4196,1446 4212,1430 R4.1@4320,1430 ; R4.1@4309.87,1421.87 ccw(c4290.24,1402.24) 4290.24,1430 ccw(c4290.24,1457.76) R4.1@4309.87,1438.13
  Bottom Layer w8: v1@2027.97,1566.01 ccw(c2013.46,1580.52) 2033.98,1580.52 ccw(c2054.51,1580.52) v1@2039.99,1566.01 ; v1@2028.99,1836.99 cw(c2014.48,1822.48) 2035,1822.48 cw(c2055.52,1822.48) v1@2041.01,1836.99 ; v1(2033.98,1560) 2033.98,1613 2033.98,1618.33 2033.98,1628.62 2057.3,1651.93 2057.3,1675.3 2023.6,1709 2023.6,1793.6 2035,1805 v1(2035,1843)
CARD_CHK: R25.1 U1.37 | length 1586.6
  Top Layer w8: R25.1@1519,639.48 ccw(c1519,667.25) 1538.63,647.62 ; R25.1@1519,647.48 ccw(c1519,694.56) 1552.29,661.27 ; R25.1@1527,635.98 1561,669.98 1561,715.39 1584.8,739.19 1584.8,784.6 1629.2,829 1776,829 ; 1727.2,829 1776,829 ; U1.37@2565.59,1085.38 cw(c2557.56,1077.35) 2568.92,1077.35 ; U1.37@2568.92,1109 2568.92,869 2565.03,865.11 2565.03,864.46 2483.58,783 2321.28,783 2275.28,829 1776,829
CARD_CON1: R58.2 U1.3 | length 3090.8
  Top Layer w8: 884.97,1005.03 ccw(c905.75,1025.82) R58.2@912.4,997.19 ; 895.16,994.84 ccw(c909.59,1009.28) R58.2@914.21,989.39 ; R58.2@915,983.98 906.02,983.98 879.47,1010.53 879.47,1041.53 802,1119 802,1264 825.8,1287.8 1071.2,1287.8 1073,1286 1072,1286 v1(1071,1285) ; 1043.72,1287.8 cw(c1043.72,1257.72) v1@1064.99,1278.99 ; 1057.24,1287.8 ccw(c1057.24,1298.76) v1@1064.99,1291.01 ; v1(1161,1334) 1159,1332 1159,1330 1163.6,1325.4 1294.81,1325.4 1307.62,1312.58 1309.04,1312.58 1338,1283.62 1338,1043.42 1386.42,995 2192.84,995 2207,1009.16 2207,1153 v1(2202,1158) ; v1@1161.35,1334.35 ccw(c1182.97,1355.97) 1182.97,1325.4 ; v1@1167.01,1340.01 ccw(c1202.28,1375.28) 1202.28,1325.4 ; U1.3@2179.14,1529.64 2224,1529.64 2265.3,1488.34 2265.3,1333.3 2246,1314 v1(2246,1219) ; v1@2195.99,1151.99 cw(c2169.41,1125.41) 2207,1125.41 ; v1@2201.65,1157.65 cw(c2188.72,1144.72) 2207,1144.72 ; U1.3@2214.57,1527.73 cw(c2214.57,1500.38) 2233.92,1519.72 ; U1.3@2215.24,1527.85 cw(c2219.7,1515.91) 2228.71,1524.93 ; v1@2239.99,1225.01 ccw(c2225.48,1239.52) 2246,1239.52 ccw(c2266.52,1239.52) v1@2252.01,1225.01
  Bottom Layer w8: v1(1071,1285) 1071,1287 1074,1290 1126,1290 1161,1325 v1(1161,1334) ; v1@1071.35,1284.65 cw(c1084.28,1271.72) 1084.28,1290 ; v1@1077.01,1278.99 cw(c1103.59,1252.41) 1103.59,1290 ; 1140.13,1304.13 ccw(c1110.25,1334) v1@1152.5,1334 ; 1153.78,1317.78 ccw(c1137.57,1334) v1@1160.5,1334 ; v1(2202,1158) 2246,1202 ; v1@2202,1166.5 ccw(c2202,1187.02) 2216.51,1172.51 ccw(c2231.02,1158) v1@2210.5,1158 ; v1@2240.9,1212.2 cw(c2233.25,1202) 2246,1202 ; v1(2246,1219) 2246,1202 ; v1@2251.1,1212.2 ccw(c2258.75,1202) 2246,1202
CARD_ERR: U1.33
CARD_OPEN: R95.2 U1.66 | length 3927.6
  Top Layer w8: R95.2@591.31,678.81 ccw(c580,671.58) 580,685 ; R95.2@591.31,691.19 cw(c580,698.42) 580,685 ; R95.2@603,685 580,685 ; 1004.08,1303.6 ccw(c1004.08,1353.14) v1@1039.11,1318.11 ; 1023.39,1303.6 ccw(c1023.39,1333.83) v1@1044.77,1312.45 ; v1(1045.12,1312.1) 1046,1311.22 1046,1310 1039.6,1303.6 926.3,1303.6 925.3,1304.6 628.96,1304.6 587.4,1263.04 587.4,1222.3 488.7,1123.6 488.7,776.3 580,685 ; v1@1127,1323.5 cw(c1127,1302.98) 1141.51,1317.49 cw(c1156.02,1332) v1@1135.5,1332 ; v1(1127,1332) 1149.4,1309.6 1288.26,1309.6 1321.2,1276.66
  Top Layer w10: 1321.2,1276.66 1321.2,1036.46 1379.46,978.2 1522.2,978.2 1523,977.4 2057,977.4 ; 2032,977.4 2057,977.4 ; 2431.82,1370 cw(c2431.82,1334.82) v1@2456.7,1359.7 ; v1@2454.55,1364.15 ccw(c2448,1363.41) 2448,1370 ; v1(2462,1365) 2453,1365 2448,1370 ; v1(2469,1574) 2502,1574 2526.59,1598.59 2526.59,1640.86 U1.66@2527.57,1641.84 ; v1@2474.3,1568.7 cw(c2487.11,1555.89) 2487.11,1574 cw(c2487.11,1592.11) v1@2474.3,1579.3 ; 2521.18,1593.18 ccw(c2507.96,1606.41) U1.66@2526.66,1606.41 ; 2057,977.4 2199,977.4 2232,1010.4 2232,1168 2247,1183 2257,1183 2282.1,1208.1 2282.1,1355 2297.1,1370 2448,1370
  Bottom Layer w8: v1(1045.12,1312.1) 1047.22,1310 1105,1310 v1(1127,1332) ; v1@1051.13,1306.09 cw(c1060.57,1296.65) 1060.57,1310 ; v1@1051.13,1318.11 ccw(c1070.71,1337.69) 1070.71,1310 ; v1@1118.5,1332 cw(c1097.98,1332) 1112.49,1317.49 cw(c1127,1302.98) v1@1127,1323.5
  Bottom Layer w10: v1@2456.7,1370.3 ccw(c2443.89,1383.11) 2462,1383.11 ccw(c2480.11,1383.11) v1@2467.3,1370.3 ; 2459,1531.75 cw(c2511.25,1531.75) v1@2474.3,1568.7 ; 2459,1555.89 cw(c2487.11,1555.89) v1@2467.23,1575.77 ; v1(2462,1365) 2462,1406 2459,1409 2459,1562.22 2460.3,1563.52 2460.3,1565.3 v1(2469,1574)
CARD_RST: R22.1 U1.34 | length 1364
  Top Layer w8: R22.1@1517,839.23 1562.23,839.23 1602.6,879.6 1722,879.6 ; R22.1@1527.13,831.1 cw(c1546.76,811.47) 1546.76,839.23 cw(c1546.76,867) R22.1@1527.13,847.37 ; 1700.6,879.6 1722,879.6 ; U1.34@2506.53,1085.38 cw(c2498.5,1077.35) 2509.86,1077.35 ; U1.34@2509.86,1122 2509.86,884.17 2456.09,830.4 2340.91,830.4 2291.71,879.6 1722,879.6
CARD_SCL: R23.1 U1.35 | length 1433.4
  Top Layer w8: R23.1@1519,774.98 ccw(c1519,802.75) 1538.63,783.12 ; R23.1@1519,782.98 ccw(c1519,830.06) 1552.29,796.77 ; R23.1@1527,771.48 1619.32,863.8 1749,863.8 ; 1717.32,863.8 1749,863.8 ; 2525.66,1077.52 cw(c2536.77,1077.52) U1.35@2528.91,1085.38 ; U1.35@2529.55,1120.18 U1.35@2527.57,1122.16 2525.66,1120.25 2525.66,873 2467.26,814.6 2334.37,814.6 2285.17,863.8 1749,863.8
CARD_SDA: R24.1 U1.36 | length 1513.7
  Top Layer w8: R24.1@1519,707.23 ccw(c1519,735) 1538.63,715.37 ; R24.1@1519,715.23 ccw(c1519,762.31) 1552.29,729.02 ; R24.1@1527,703.73 1569,745.73 1569,791.14 1625.86,848 1771,848 ; 1723.86,848 1771,848 ; U1.36@2545.9,1085.38 cw(c2537.87,1077.34) 2549.23,1077.34 ; U1.36@2549.23,1111 2549.23,871 2477.03,798.8 2327.82,798.8 2278.62,848 1771,848
CARD_VC_IN: R21.1 U1.30 | length 1328.3
  Top Layer w8: R21.1@1517,906.98 1521.22,911.2 1690,911.2 ; R21.1@1521.47,904.51 cw(c1537.63,888.36) 1537.63,911.2 ; R21.1@1527.13,898.85 cw(c1556.94,869.04) 1556.94,911.2 ; R21.1@1527.13,915.12 ccw(c1536.59,924.57) 1536.59,911.2 ; 1629.22,911.2 1690,911.2 ; U1.30@2427.79,1085.38 cw(c2419.76,1077.35) 2431.12,1077.35 ; U1.30@2429.14,1122.16 2431.12,1120.18 2431.12,1055.36 2441.78,1044.7 2441.78,888.1 2415.68,862 2354,862 2304.8,911.2 1690,911.2
CD_CLK: P1.8 R23.2 R30.2 | length 2125.7
  Top Layer w8: v1@507.02,966.96 cw(c471.41,931.03) 522,931.03 ; v1@512.65,972.64 cw(c490.42,950.21) 522,950.21 ; v1(513,973) 522,964 522,932 546,908 ; v1@556.2,902.9 ccw(c546,895.25) 546,908 ; v1@556.2,913.1 cw(c546,920.75) 546,908 ; v1@569.01,901.99 cw(c583.52,887.48) 583.52,908 cw(c583.52,928.52) v1@569.01,914.01 ; v1@574.66,908 cw(c574.66,877.91) R30.2@602.73,888.74 ; 586.32,908 cw(c586.32,882.41) R30.2@610.2,891.62 ; 589,909 cw(c574.83,894.83) R30.2@594.64,891.76 ; 589.78,908.22 ccw(c606,924.43) R30.2@606,901.5 ; R30.2@595.27,885.86 ccw(c563,873.41) v1(563,908) ; R30.2@608,890 590,908 v1(563,908) ; 818,930.18 866.92,930.18 951.7,845.4 1255.88,845.4 1277.84,823.43 1383.57,823.43 1435.52,771.48 R23.2@1450,771.48 R23.2@1460,771.48 ; 1407.06,799.94 ccw(c1448,840.89) R23.2@1448,782.98 ; 1420.71,786.29 ccw(c1448,813.57) R23.2@1448,774.98 ; 546,908 v1(563,908)
  Bottom Layer w8: P1.8@183,1012.73 cw(c183,944.49) 231.26,992.74 ; P1.8@183,1020.73 cw(c183,971.8) 217.6,1006.4 ; P1.8@183,1030.26 193.74,1030.26 240,984 502,984 v1(513,973) ; P1.8@208.53,1030.26 ccw(c244.23,1030.26) 218.98,1005.02 ; 465.92,984 cw(c465.92,925.92) v1@506.99,966.99 ; 485.24,984 cw(c485.24,945.24) v1@512.65,972.65 ; 504.55,984 cw(c504.55,964.55) v1@518.3,978.3 ; v1@563,916.5 ccw(c563,946.68) 584.34,925.34 ; v1@567,908 597,938 738,938 770,906 791,906 813,928 ; v1@571.5,908 cw(c582.36,908) 574.68,915.68 ; 798,913 ccw(c778.91,932.09) v1@804.84,939.63 ; 807.57,922.57 ccw(c793.73,936.4) v1@812.52,941.86
  other v1: 813,942
CD_IO: P1.6 R24.2 R26.2 | length 1979.6
  Top Layer w8: v1(553,956) 605.5,956 R26.2@607,957.5 ; v1@559.01,949.99 cw(c573.52,935.48) 573.52,956 cw(c573.52,976.52) v1@559.01,962.01 ; 573.62,956 ccw(c573.62,988.88) R26.2@596.87,965.63 ; 580.86,956 cw(c580.86,933.36) R26.2@596.87,949.37 ; v1@780,924.5 cw(c780,903.98) 794.51,918.49 cw(c809.02,933) v1@788.5,933 ; v1(780,933) 798.62,914.38 860.38,914.38 945.16,829.6 1249.33,829.6 1271.3,807.63 1376.37,807.63 1406.83,777.17 1406.83,746.91 R24.2@1450,703.73 R24.2@1460,703.73 ; 1426.95,726.78 cw(c1403.91,703.73) R24.2@1436.5,703.73 ; 1431.78,721.95 ccw(c1448,738.17) R24.2@1448,715.23
  Bottom Layer w8: P1.6@182.56,936.72 cw(c185.33,896.12) 214.11,924.89 ; P1.6@183,930.26 208.74,930.26 251,888 302,888 ; P1.6@183.1,928.74 cw(c186.92,872.83) 226.55,912.45 ; P1.6@183.65,920.75 cw(c188.51,849.54) 238.99,900.01 ; P1.6@184.19,912.77 cw(c190.1,826.25) 251.43,887.57 ; 315,888 302,888 ; 537.08,938.08 ccw(c519.15,956) v1@544.5,956 ; 541.9,942.9 cw(c553,931.81) v1@553,947.5 ; v1@559.01,949.99 cw(c573.52,935.48) 573.52,956 cw(c573.52,976.52) v1@559.01,962.01 ; v1@771.5,933 ccw(c750.98,933) 765.49,947.51 ccw(c780,962.02) v1@780,941.5 ; v1(780,933) 757,956 v1(553,956) 553,954 487,888 302,888
CD_RST: P1.10 R8.2 R22.2 | length 2088.4
  Top Layer w8: P1.10@183,1104.73 cw(c183,1043.1) 226.58,1086.68 cw(c270.16,1130.26) P1.10@208.53,1130.26 ; P1.10@183,1112.73 cw(c183,1070.42) 212.92,1100.34 cw(c242.84,1130.26) P1.10@200.53,1130.26 ; P1.10@183,1130.26 232,1081.26 232,902 252,882 307,882 v1(335,854) ; v1@326.5,854 ccw(c305.98,854) 320.49,868.51 ccw(c335,883.02) v1@335,862.5 ; v1@564,858.5 cw(c564,837.98) 578.51,852.49 cw(c593.02,867) v1@572.5,867 ; v1(564,867) 607,824 R8.2@607,822.5 ; 582.89,848.11 cw(c557.29,822.5) R8.2@593.5,822.5 ; 591.34,839.66 ccw(c605,853.31) R8.2@605,834 ; v1(845.8,954.48) 846.28,954 865.45,954 ; v1@851.81,948.47 cw(c865.16,935.12) 865.16,954 ; v1@852.23,960.04 ccw(c865.45,971.48) 865.45,954 ; R22.2@1439.87,831.1 ccw(c1420.24,811.47) 1420.24,839.23 ccw(c1420.24,867) R22.2@1439.87,847.37 ; R22.2@1460,839.23 R22.2@1450,839.23 1284.39,839.23 1262.42,861.2 958.25,861.2 865.45,954
  Bottom Layer w8: v1(335,854) 348,867 ; v1@335.69,862.47 ccw(c336.95,878.05) 348,867 ; v1@343.47,854.69 cw(c359.05,855.95) 348,867 ; v1@557.99,860.99 ccw(c543.48,846.48) 543.48,867 ccw(c543.48,887.52) v1@557.99,873.01 ; v1(845.8,954.48) 845.48,954.48 837.3,946.3 837.3,929.96 797.54,890.2 763.46,890.2 731.46,922.2 619,922.2 564,867.2 v1(564,867) 348,867
CD_VCC: P1.12 R2.2 R21.2 | length 2610.5
  Top Layer w8: v1@552.9,814.2 cw(c545.25,804) 558,804 ; v1(558,821) 558,804 ; v1@563.1,814.2 ccw(c570.75,804) 558,804 ; 583.95,778.05 cw(c560.91,755) R2.2@593.5,755 ; 588.78,773.22 ccw(c605,789.43) R2.2@605,766.5 ; R2.2@607,755 558,804 ; v1@908.5,942 ccw(c929.52,942) 914.66,927.13 ; v1(916,942) 912.9,938.9 912.9,928.9 964.79,877 1420.02,877 R21.2@1450,906.98 R21.2@1460,906.98 ; v1@916.5,942 ccw(c956.84,942) 928.31,913.48 ; v1@924.5,942 ccw(c984.15,942) 941.97,899.82 ; 1426.95,883.94 ccw(c1403.91,906.98) R21.2@1436.5,906.98 ; 1431.78,888.77 cw(c1448,872.55) R21.2@1448,895.48
  Bottom Layer w8: 127.22,1157.22 ccw(c54.17,1230.26) P1.12@157.47,1230.26 ; 140.87,1170.87 ccw(c81.49,1230.26) P1.12@165.47,1230.26 ; 154.53,1184.53 ccw(c108.8,1230.26) P1.12@173.47,1230.26 ; 168.19,1198.19 ccw(c136.12,1230.26) P1.12@181.47,1230.26 ; 168.89,1198.89 cw(c183,1184.77) P1.12@183,1204.73 ; P1.12@183,1230.26 183,1213 99,1129 99,820 138,781 414,781 454,821 v1(558,821) 557.5,821.5 588.3,852.3 588.3,869.16 619.14,900 731.31,900 756.91,874.4 804.09,874.4 871.69,942 v1(916,942) ; v1@551.99,814.99 ccw(c537.48,800.48) 537.48,821 ccw(c537.48,841.52) v1@551.99,827.01 ; v1@558,829.5 ccw(c558,847.61) 570.8,834.8 ; v1@566.5,821 cw(c589.43,821) 573.22,837.22 ; v1@909.99,935.99 ccw(c895.48,921.48) 895.48,942 ccw(c895.48,962.52) v1@909.99,948.01
CD_XB: P1.4 R25.2 R27.2 | length 2266
  Top Layer w10: v1(555,1028) 558,1025 R27.2@607,1025 641,1059 721,1059 745.8,1034.2 745.8,916 764.8,897 854,897 938.2,812.8 1242.37,812.8 1264.34,790.83 1369.41,790.83 1390.03,770.21 1390.03,705.58 1450,645.61 R25.2@1450,635.98 ; v1@560.3,1033.3 ccw(c580.35,1053.35) 580.35,1025 ; R27.2@597.58,1017.58 ccw(c579.65,999.65) 579.65,1025 ccw(c579.65,1050.35) R27.2@597.58,1032.42 ; R27.2@609,1035.5 ccw(c609,1056.02) 623.51,1041.51 ; R27.2@619.5,1025 cw(c649.68,1025) 628.34,1046.34 ; 1421.86,673.75 cw(c1384.09,635.98) R25.2@1437.5,635.98 ; 1438.93,656.68 cw(c1418.24,635.98) R25.2@1447.5,635.98 ; R25.2@1455,640.98 R25.2@1460,635.98
  Bottom Layer w10: P1.4@158.47,830.26 ccw(c99.26,830.26) 141.13,872.13 ccw(c183,914) P1.4@183,854.79 ; P1.4@168.47,830.26 ccw(c133.4,830.26) 158.2,855.06 ccw(c183,879.86) P1.4@183,844.79 ; P1.4@183,830.26 125,888.26 125,1062 146,1083 244,1083 477,1083 532,1028 v1(555,1028) ; v1@549.7,1022.7 ccw(c536.89,1009.89) 536.89,1028 ccw(c536.89,1046.11) v1@549.7,1033.3
CHEAK_POWER: U1.76
CSB_IRDA_EN: U1.74
CSB_IRDA_RX: C37.1 Q11.C R16.1 R87.1 U1.28 | length 3509.9
  Top Layer w10: v1(1062,1347) 1063,1346 1063,1338 1085.9,1315.1 1085.9,1307.1 1116,1277 1268.64,1277 1287.6,1258.04 1287.6,1022.54 1366.34,943.8 2362.8,943.8 R16.1@2388,969 2388.79,969.79 2388.79,1096.04 2390.75,1098 2390.75,1121.18 U1.28@2389.77,1122.16 ; v1@1069.5,1347 ccw(c1106.92,1347) 1080.46,1320.54 ; v1(1095,2087) 1268,2087 1300,2055 Q11.C@1346,2055 1346,2142.51 C37.1@1332,2156.51 1267.49,2156.51 R87.1@1267,2157 ; v1@1100.3,2081.7 cw(c1113.11,2068.89) 1113.11,2087 cw(c1113.11,2105.11) v1@1100.3,2092.3 ; R87.1@1274.42,2149.58 cw(c1291.16,2132.84) 1291.16,2156.51 ; R87.1@1274.42,2164.42 ccw(c1293.53,2183.53) 1293.53,2156.51 ; C37.1@1324.58,2147.08 cw(c1272.85,2095.36) 1346,2095.36 ; C37.1@1324.58,2149.08 ccw(c1306.65,2131.16) 1306.65,2156.51 ccw(c1306.65,2181.86) C37.1@1324.58,2163.93 ; C37.1@1331.65,2154.16 cw(c1296.99,2119.5) 1346,2119.5 ; Q11.C@1336.81,2045.81 ccw(c1314.62,2023.62) 1314.62,2055 ccw(c1314.62,2086.38) Q11.C@1336.81,2064.19 ; Q11.C@1336.81,2071.19 ccw(c1314.62,2093.38) 1346,2093.38 ccw(c1377.38,2093.38) Q11.C@1355.19,2071.19 ; C37.1@1338.72,2161.23 cw(c1321.14,2143.64) C37.1@1346,2143.64 ; 2366.66,947.66 cw(c2388,926.32) R16.1@2388,956.5 ; 2371.49,952.49 ccw(c2356.98,967) R16.1@2377.5,967 ; R16.1@2380.58,978.42 ccw(c2360.74,998.26) 2388.79,998.26 ; 2388.79,994.44 ccw(c2411.44,994.44) R16.1@2395.42,978.42
  Bottom Layer w10: v1@1059.54,1346.55 cw(c1079.8,1350.27) 1065.23,1364.83 ; v1(1062,1347) 1058,1347 1058,1357.6 1078.7,1378.3 ; v1@1069.38,1348.36 cw(c1102.55,1354.45) 1078.7,1378.3 ; 1078.7,1636.3 1078.7,1378.3 ; 1081.4,1639 1081.4,2073.4 v1(1095,2087) ; v1@1087.5,2087 cw(c1069.39,2087) 1082.2,2074.2 cw(c1095,2061.39) v1@1095,2079.5
CSB_IRDA_TX: R102.2 R104.2 U1.27 | length 3090.2
  Top Layer w8: R102.2@757,1964.5 cw(c757,1931.91) 780.05,1954.95 ; R102.2@757,1991.5 ccw(c757,2024.09) 780.05,2001.05 ; R102.2@768.5,1976 ccw(c791.43,1976) 775.22,1959.78 ; R102.2@768.5,1980 cw(c791.43,1980) 775.22,1996.22 ; 790.14,2028.45 cw(c817.42,2001.17) R104.2@821.62,2039.52 ; 792,2030.31 R104.2@806.69,2045 ; 793.45,2031.77 cw(c814.32,2010.9) R104.2@821.19,2039.6 ; 801.93,2040.24 cw(c819.75,2022.43) R104.2@822.49,2047.47 ; 803.56,2041.87 cw(c818.22,2027.22) R104.2@823.05,2047.38 ; R104.2@822,2045 R104.2@806.69,2045 ; v1(1095,1347) 1102.7,1339.3 1102.7,1314.06 1122.96,1293.8 1275.6,1293.8 1304.4,1265 1304.4,1029.5 1373.3,960.6 2205.96,960.6 2206.76,961.4 2243.23,961.4 2243.93,960.7 2299.79,960.7 2370.09,1031 U1.27@2370.09,1122.16 ; v1@1107.99,1910.99 ccw(c1093.48,1896.48) 1093.48,1917 ccw(c1093.48,1937.52) v1@1107.99,1923.01 ; v1@1111,1920 v1(1114,1917) 853,1917 826.5,1943.5 791.5,1943.5 R102.2@757,1978 787,2008 787,2025.31 R104.2@806.69,2045
  Bottom Layer w8: v1@1088.99,1353.01 ccw(c1066.75,1375.25) 1098.2,1375.25 ; v1(1095,1347) 1097,1347 1098.2,1348.2 1098.2,1901.2 v1(1114,1917) ; 1098.2,1359.8 ccw(c1107.8,1359.8) v1@1101.01,1353.01 ; v1@1105.5,1917 cw(c1084.98,1917) 1099.49,1902.49 cw(c1114,1887.98) v1@1114,1908.5